# EAGLE board BOSS_FA-1-V1.2 (EAGLE 9.6.2)
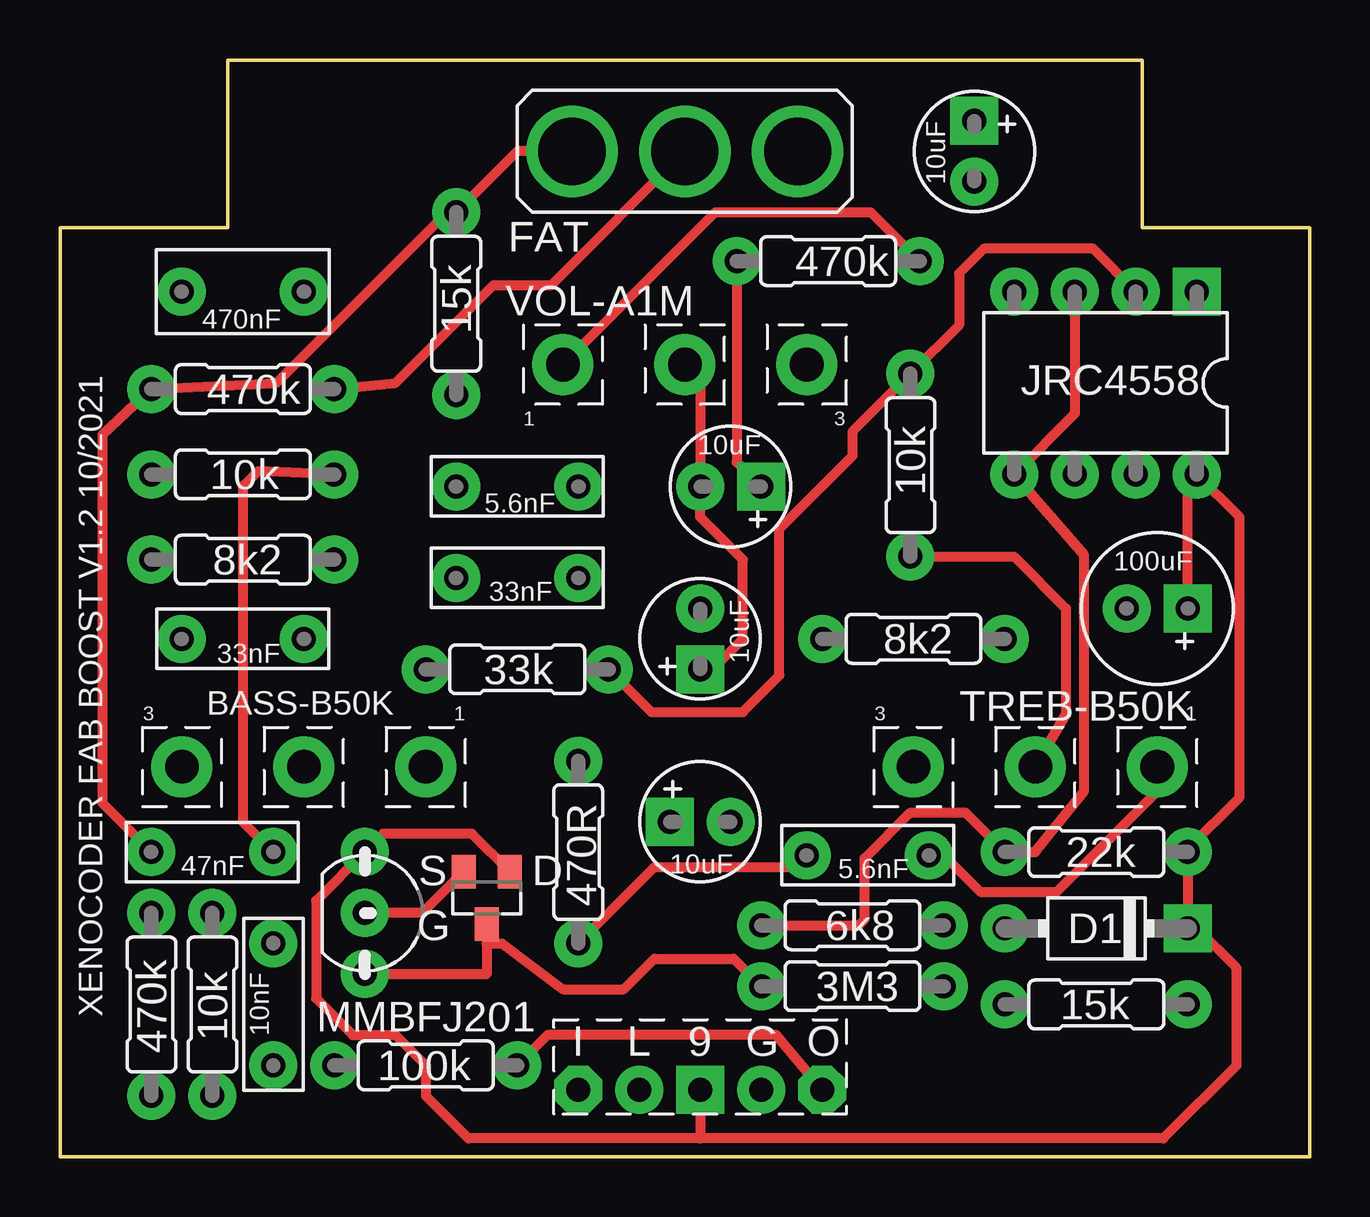
[diagram p0: board, top side]
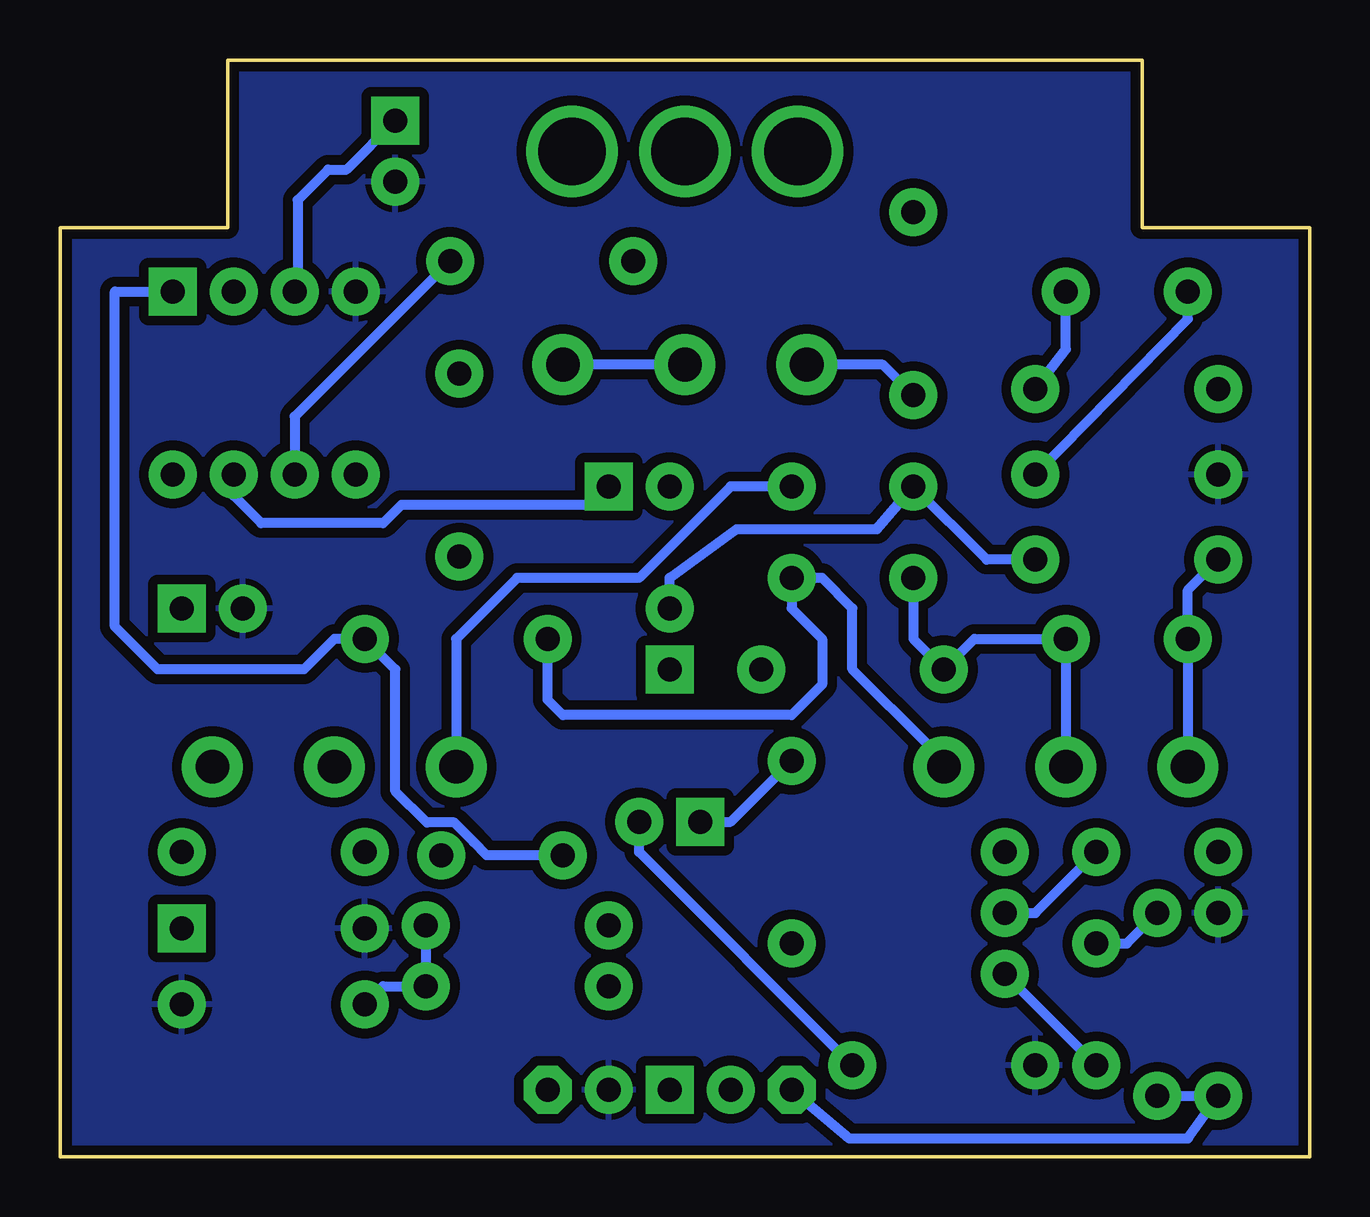
[diagram p1: board, bottom side, seen from below]

Size 52.07 x 45.72 mm. Coordinates in mm from the lower left corner, seen from the top.
Outline: 52.07,38.73 52.07,0 0,0 0,38.73 6.99,38.73 6.99,45.72 45.09,45.72 45.09,38.73 52.07,38.73
Copper layers (1*16): Top 0.0356mm / dielectric 1.5011mm / Bottom 0.0356mm
Design rules "LaenPCBOrder": minimum track width 6mil, minimum drill 13mil, track to track 6mil, track to pad 6mil, pad to pad 6mil, via to via 6mil, smd to smd 6mil, copper to edge 15mil, drill to drill 6mil, minimum pad ring 7mil, minimum via ring 7mil, stop-mask expansion 3mil, vias tented up to drill 0mil, thermal gap 10mil

## Footprints (pad centres in the part's own frame; a part is rotated, then mirrored left to right if it is on the bottom)
16MM_PCB_PADS = drill 1.4 pad 2.54: 1 5.08,0; 2 0,0; 3 -5.08,0
072X025 = drill 1 pad 2: 1 -2.54,0; 2 2.54,0
072X035 = drill 1 pad 2: 1 -2.54,0; 2 2.54,0
050_020_1 = drill 1 pad 2 square: + -1.27,0 | drill 1 pad 2: - 1.27,0
063_025 = drill 1 pad 2 square: + -1.27,0 | drill 1 pad 2: - 1.27,0
DO41-3 = drill 1 pad 2: A 3.81,0 | drill 1 pad 2 square: C -3.81,0
M9040P = drill 2.8 pad 3.81: 1 0,4.699; 2 0,0; 3 0,-4.699
DIL08 = drill 1 pad 2 square: 1 -3.81,-3.81 | drill 1 pad 2: 2 -1.27,-3.81; 3 1.27,-3.81; 4 3.81,-3.81; 5 3.81,3.81; 6 1.27,3.81; 7 -1.27,3.81; 8 -3.81,3.81
SOT23 = smd 1 x 1.4: 1 -0.95,-1.1; 2 0.95,-1.1; 3 0,1.1
TO92- = drill 1 pad 2: 1 2.54,0; 2 0,0; 3 -2.54,0
R0207/3 = drill 1 pad 2: 1 -3.81,0; 2 3.81,0
BOARDLINK = drill 1 pad 2 octagon: 1 -2.54,0; 5 7.62,0 | drill 1 pad 2: 2 0,0; 4 5.08,0 | drill 1 pad 2 square: 3 2.54,0

## Placement (x,y rotation side)
BASS-B50K  B50K  [16MM_PCB_PADS]  10.16,16.26 0 top
C1  10nF  [072X025]  8.89,6.35 270 top
C2  470nF  [072X035]  7.62,36.07 0 top
C3  47nF  [072X025]  6.35,12.7 180 top
C4  10uF  [050_020_1]  27.94,27.94 180 top
C5  10uF  [050_020_1]  26.67,21.59 90 top
C6  33nF  [072X025]  7.62,21.59 0 top
C7  33nF  [072X025]  19.05,24.13 180 top
C8  5.6nF  [072X025]  19.05,27.94 180 top
C9  5.6nF  [072X025]  33.66,12.57 0 top
C10  10uF  [050_020_1]  26.67,13.97 0 top
C11  10uF  [050_020_1]  38.1,41.91 270 top
C12  100uF  [063_025]  45.72,22.86 180 top
D1  1N4001  [DO41-3]  43.18,9.53 180 top
FAT  [M9040P]  26.04,41.91 270 top
IC1  JRC4558  [DIL08]  43.56,32.26 180 top
MMBFJ201  [SOT23]  17.78,10.79 180 top
Q1  J201  [TO92-]  12.7,10.16 270 top
R1  10k  [R0207/3]  6.35,6.35 90 top
R2  3M3  [R0207/3]  33.02,7.11 0 top
R3  10k  [R0207/3]  7.62,28.45 0 top
R4  470k  [R0207/3]  7.62,32 180 top
R5  15k  [R0207/3]  16.51,35.56 270 top
R6  470k  [R0207/3]  32,37.34 180 top
R7  8k2  [R0207/3]  7.62,24.89 180 top
R8  33k  [R0207/3]  19.05,20.32 0 top
R9  8k2  [R0207/3]  35.56,21.59 180 top
R10  10k  [R0207/3]  35.43,28.83 90 top
R11  470R  [R0207/3]  21.59,12.7 270 top
R12  100k  [R0207/3]  15.24,3.81 0 top
R13  22k  [R0207/3]  43.18,12.7 0 top
R14  6k8  [R0207/3]  33.02,9.65 180 top
R15  15k  [R0207/3]  43.18,6.35 0 top
R17  470k  [R0207/3]  3.81,6.35 90 top
TREB-B50K  B50K  [16MM_PCB_PADS]  40.64,16.26 0 top
U$1  BOARDLINK  [BOARDLINK]  24.13,2.79 0 top
VOL-A1M  A1M  [16MM_PCB_PADS]  26.04,33.02 180 top

## Library data of the parts
BASS-B50K TREB-B50K VOL-A1M = mb_pots
C1-C3 C6-C9 = mb_caps-box
C4 C5 C10-C12 = mb_caps-electro
D1 = mb_diodes
FAT = mb_switches
IC1 = mb_ics
MMBFJ201 U$1 = xc_library
Q1 = mb_trans
R1-R15 R17 = mb_resistors

## Nets
+9V: C12.+ D1.C IC1.8 MMBFJ201.1 Q1.3 R13.2 U$1.3
A: C11.+ IC1.3 IC1.5 R13.1 R14.2
GND: C11.- C12.- D1.A IC1.4 R3.1 R12.1 R15.2 R17.2 U$1.4
N$1: C1.1 R1.2
N$2: C1.2 MMBFJ201.3 Q1.1 R2.1
N$4: R10.1 TREB-B50K.2
N$5: C3.2 FAT.3 R4.2 R5.1
N$6: C4.+ IC1.7 R6.2
N$7: IC1.6 R5.2 R6.1 VOL-A1M.1
N$8: R1.1 R17.1 U$1.1
N$9: C2.2 FAT.2 R4.1
N$10: C2.1 C3.1 MMBFJ201.2 Q1.2 R3.2
N$11: C4.- C5.+ VOL-A1M.2 VOL-A1M.3
N$12: C5.- C8.2 R7.1
N$13: BASS-B50K.3 C6.1 R7.2
N$14: BASS-B50K.2 C6.2 C7.2 R8.1
N$15: BASS-B50K.1 C7.1 R9.2
N$16: C9.1 IC1.1 R9.1 R11.2
N$17: IC1.2 R8.2 R10.2
N$18: C9.2 TREB-B50K.1
N$19: C8.1 TREB-B50K.3
N$20: C10.+ R11.1
N$21: R2.2 R14.1 R15.1
N$22: C10.- R12.2 U$1.5

## Tracks (layer width: path | path; a pad name or v marks a point on that pad's centre or on a via)
+9V
  Top 0.406: 26.67,0.76 45.97,0.76 49.02,3.81 49.02,7.87 47.37,9.53 D1.C R13.2 46.99,12.83 49.15,14.99 49.15,26.67 IC1.8 46.99,28.07 C12.+ | 26.67,0.76 17.02,0.76 15.24,2.54 15.24,3.81 13.97,5.08 12.19,5.08 10.67,6.6 10.67,10.67 Q1.3 13.46,13.46 17.16,13.46 MMBFJ201.1 | U$1.3 26.67,0.76
A
  Top 0.406: R14.2 33.27,9.65 33.53,9.91 33.53,12.45 35.43,14.35 37.72,14.35 R13.1 40.64,12.7 42.67,15.24 42.67,25.08 IC1.5 42.29,30.99 IC1.3
  Bottom 0.406: C11.+ 40.13,41.15 40.89,41.15 42.16,39.88 42.16,36.2 IC1.3
GND
  pour Bottom (isolate 0.406): 0.13,-0.13 0.13,38.61 0,38.73 6.99,38.73 6.99,45.72 44.83,45.72 45.09,45.47 45.09,38.73 52.07,38.73 52.07,0 0.25,0
N$1
  Bottom 0.406: C1.1 7.62,8.89 R1.2
N$2
  Top 0.406: Q1.1 17.78,7.62 17.78,8.89 | 17.78,8.89 18.41,8.89 20.95,6.99 23.5,6.99 24.77,8.26 28.07,8.26 R2.1 | MMBFJ201.3 17.78,8.89
  Bottom 0.406: C1.2 Q1.1
N$4
  Top 0.406: TREB-B50K.2 41.91,18.41 41.91,22.86 39.75,25.02 R10.1
N$5
  Top 0.406: C3.2 1.78,14.73 1.78,30.1 R4.2 9.02,32.26 16.13,39.37 R5.1 19.05,41.91 FAT.3
N$6
  Top 0.406: R6.2 28.19,28.96 C4.+
  Bottom 0.406: C4.+ 29.97,27.18 37.85,27.18 38.61,26.42 43.69,26.42 44.83,27.56 IC1.7
N$7
  Top 0.406: VOL-A1M.1 27.3,39.37 33.78,39.37 R6.1
  Bottom 0.406: R5.2 17.78,33.02 VOL-A1M.1 | R6.1 42.29,30.86 IC1.6
N$8
  Bottom 0.406: R1.1 R17.1 5.08,0.76 19.18,0.76 U$1.1
N$9
  Top 0.406: R4.1 13.97,32.26 18.03,36.32 20.45,36.32 FAT.2
  Bottom 0.406: R4.1 10.16,33.66 C2.2
N$10
  Top 0.406: R3.2 8.26,28.57 7.62,27.94 7.62,13.97 C3.1 | MMBFJ201.2 15.1,10.16 Q1.2
  Bottom 0.406: R3.2 5.08,34.92 C2.1 | Q1.2 11.43,10.16 C3.1
N$11
  Top 0.406: C5.+ 27.18,20.32 28.45,21.59 28.45,24.89 26.67,26.67 C4.- 26.67,32.38 VOL-A1M.2
  Bottom 0.406: VOL-A1M.2 VOL-A1M.3
N$12
  Bottom 0.406: R7.1 13.46,24.89 C8.2 18.03,26.16 23.88,26.16 26.67,24.13 C5.-
N$13
  Bottom 0.406: BASS-B50K.3 C6.1 5.08,23.62 R7.2
N$14
  Bottom 0.406: BASS-B50K.2 C6.2 13.97,21.59 R8.1 16.51,21.59 C7.2
N$15
  Bottom 0.406: BASS-B50K.1 15.88,17.14 19.05,20.32 19.05,22.86 20.32,24.13 C7.1 21.59,22.86 20.32,21.59 20.32,19.68 21.59,18.41 31.11,18.41 31.75,19.05 R9.2
N$16
  Top 0.406: R11.2 24.77,12.06 30.61,12.06 C9.1
  Bottom 0.406: C9.1 34.29,12.57 34.84,13.12 34.84,13.13 35.63,13.93 36.79,13.93 38.1,15.24 38.1,20.32 R9.1 40.64,21.59 41.91,20.32 48.01,20.32 49.78,22.1 49.78,36.07 IC1.1
N$17
  Top 0.406: R8.2 24.64,18.54 28.45,18.54 29.97,20.07 29.97,26.16 33.02,29.21 33.02,30.23 R10.2 37.47,34.67 37.47,36.83 38.48,37.85 43.05,37.85 IC1.2
N$18
  Top 0.406: C9.2 36.83,12.57 38.35,11.05 41.53,11.05 45.72,15.24 TREB-B50K.1
N$19
  Bottom 0.406: C8.1 24.13,27.94 27.94,24.13 33.02,24.13 35.56,21.59 TREB-B50K.3
N$20
  Bottom 0.406: C10.+ 24.13,13.97 R11.1
N$21
  Bottom 0.406: R14.1 R2.2 38.61,7.11 R15.1
N$22
  Top 0.406: U$1.5 29.84,5.08 20.32,5.08 R12.2
  Bottom 0.406: R12.2 27.94,12.7 C10.-

## Text on the board
tNames: XENOCODER FAB BOOST V1.2 10/2021